# Altium PCB nora_chirp.PcbDoc
Units mil, origin at the board's own origin, x right, y up, seen from the top; angles counter-clockwise.
Board outline 2740 x 1400 mil, 2 copper layers (Top Layer, Bottom Layer), stack 64.8 mil thick; 71 components, 41 nets, 255 pads, 160 vias.
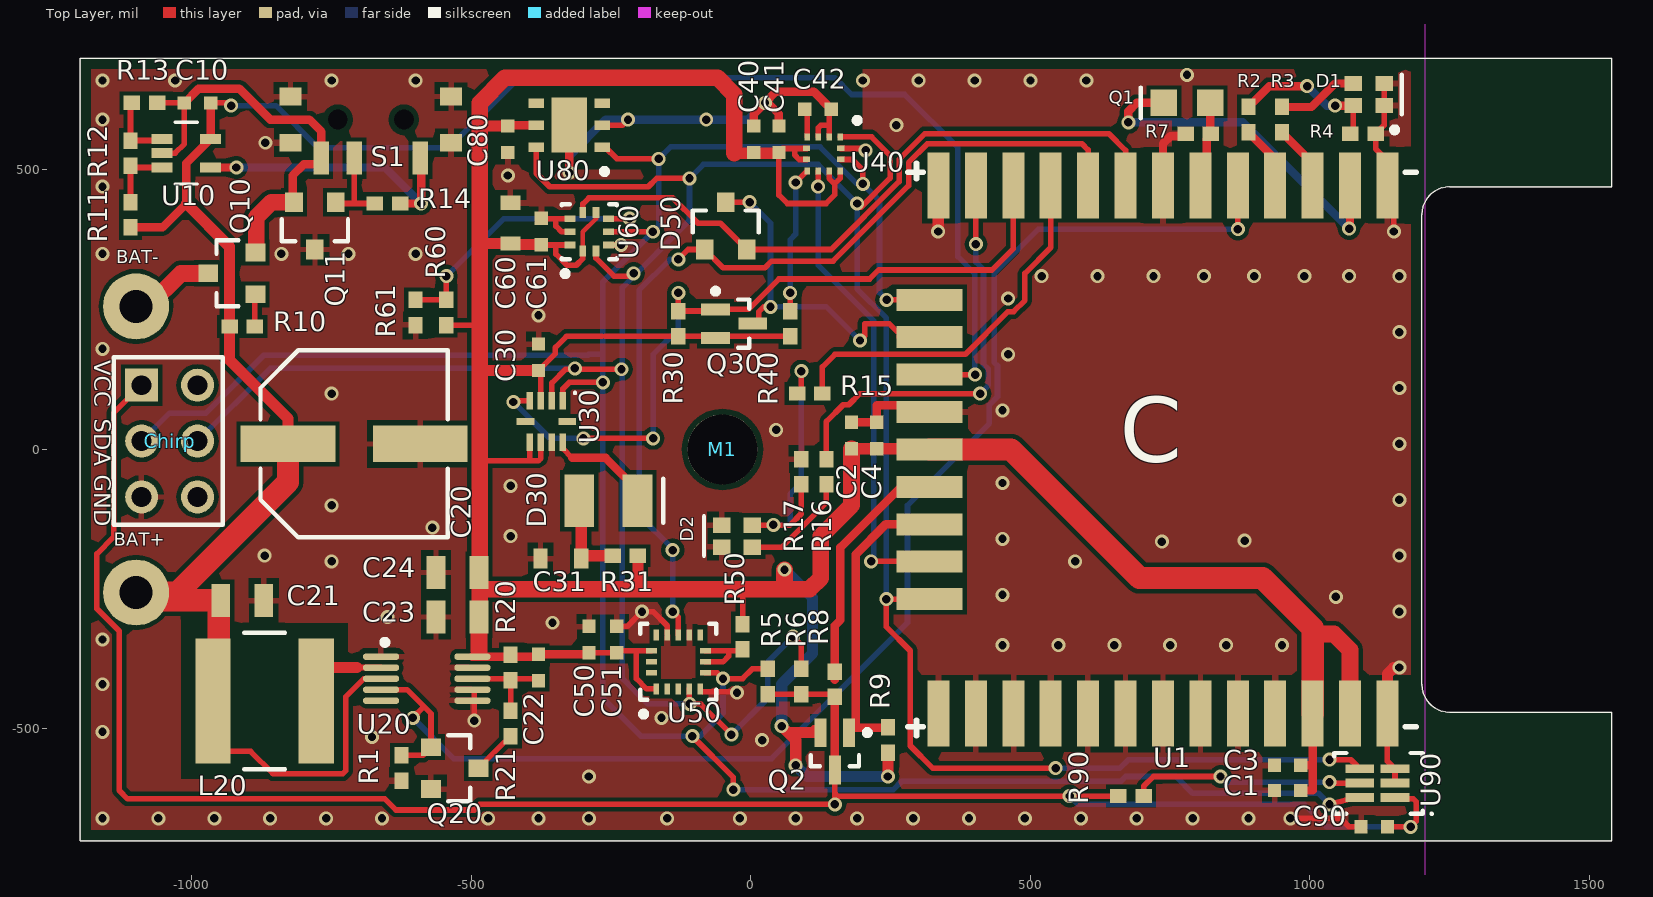
[diagram p0: Top Layer view]
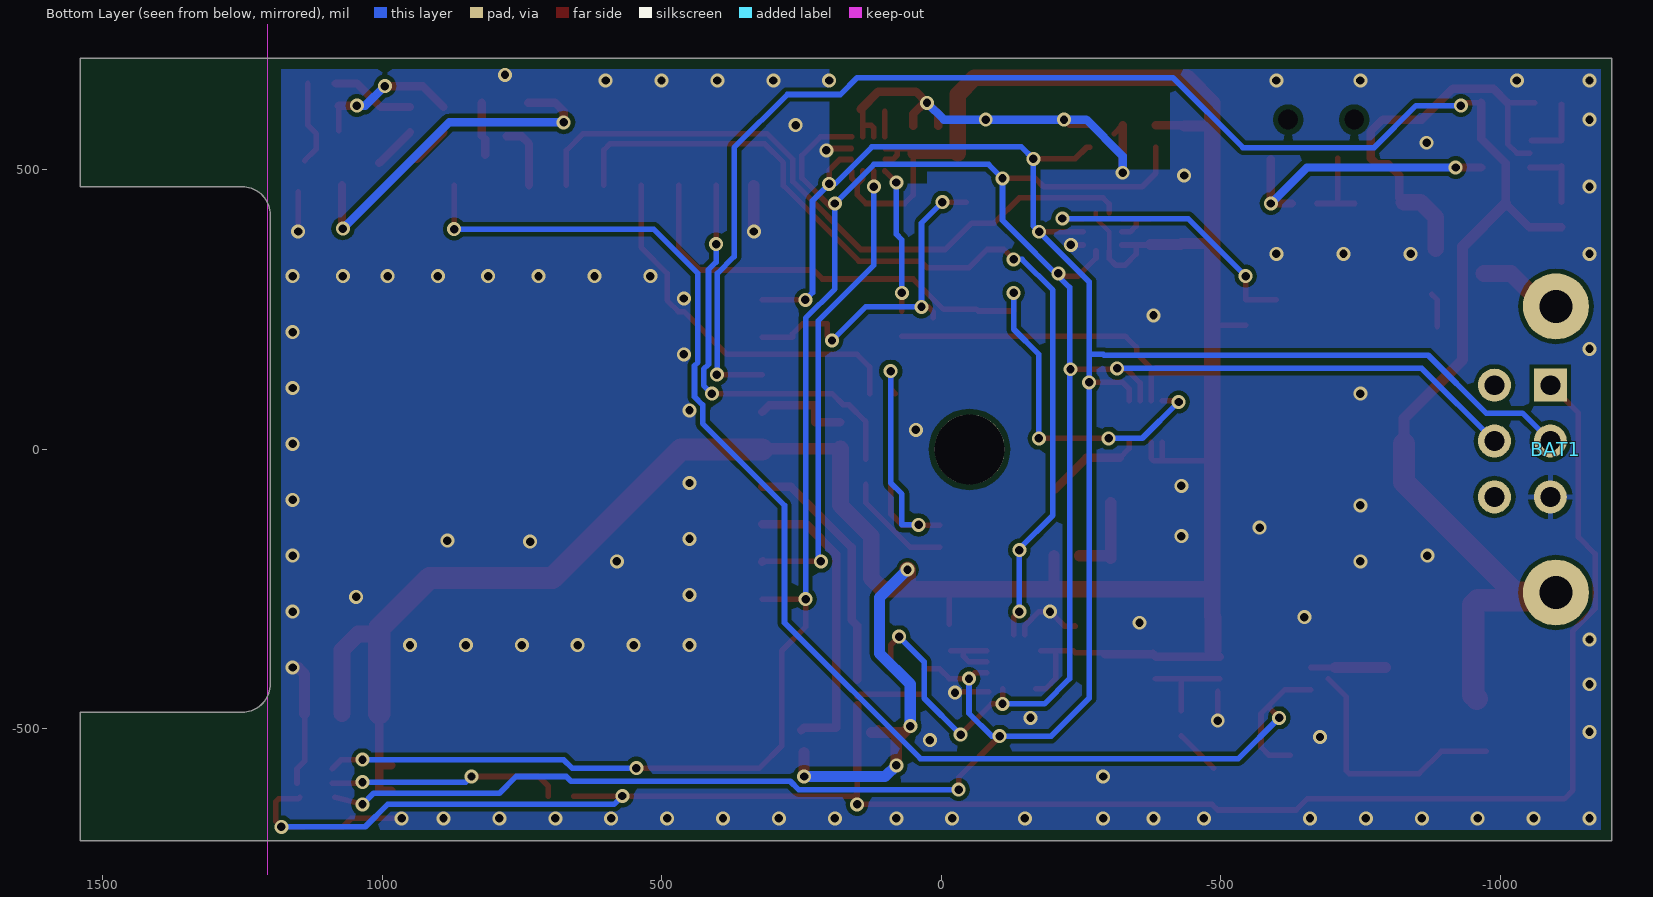
[diagram p1: Bottom Layer view, seen from below]

## Layer stack, top to bottom
Top Solder: solder mask 0.4, Solder Resist, Dk 3.5
Top Layer: signal copper 1.4
Dielectric1: core 62, FR-4, Dk 4.8
Bottom Layer: signal copper 1.4
Bottom Solder: solder mask 0.4, Solder Resist, Dk 3.5

## Board outline
-1200,-700 -1200,700 1540,700 1540,470 1250,470 ccw(c1250,420) 1200,420 1200,-420 ccw(c1250,-420) 1250,-470 1540,-470 1540,-700

## Design rules (kind name [scope] priority, off if disabled: settings)
Clearance "I2C clearance" [(InNet('SCL') AND IsTrack) vs (InNet('SDA') AND IsTrack)] p1: gap=8
Clearance "NPTH Clearance" [IsThruPin and (not PadIsPlated)] p2: gap=10
Clearance "Diff to Poly" [(InDifferentialPairClass('All Differential Pairs')) OR InNet('PinA') OR InNet('PinB') vs InPolygon] p3: gap=30
Clearance "50_OHM to Poly" [InNetClass('50_OHM') and (IsTrack or IsArc) vs InPolygon] p4: gap=30
Clearance "Polygon to All" [InPolygon] p5: gap=8
Clearance [All] p6: gap=6
Clearance "Pad Clearance" [IsPad vs IsPad] p7: gap=8
Clearance "XTAL Clearance" [(InNet('OSC32_IN') OR InNet('OSC32_OUT') OR InComponent('Y1')) vs InPolygon] p8: gap=30
HoleSize [All] p1: absolutevalues=TRUE maxlimit=125 minlimit=1 maxpercent=80.000 minpercent=20.000
HoleToHoleClearance [All] p1: gap=6 allowstackedmicrovias=TRUE
MinimumSolderMaskSliver [All] p1: minsoldermaskwidth=1
PolygonConnect "Direct GND" [InNet('GND') and IsVia] p1: connectstyle=Direct reliefconductorwidth=10 reliefentries=4 polygonreliefangle="90 Angle" airgapwidth=10
PolygonConnect [All] p2: connectstyle=Relief reliefconductorwidth=10 reliefentries=4 polygonreliefangle="90 Angle" airgapwidth=10
RoutingVias [All] p1: holewidth=15 width=25 viastyle="Through Hole" minholewidth=8 minwidth=18 maxholewidth=15 maxwidth=25
SilkToSilkClearance [All] p1: silktosilkclearance=3.94
SilkToSolderMaskClearance [IsPad vs Not HasFootprint('IMP_MODULE')] p1: minsilkscreentomaskgap=7.87 clearancetoexposedcopper=TRUE
SolderMaskExpansion [All] p1: expansion=4
UnpouredPolygon [All] p1: allowunpoured=FALSE
Width 50_OHM [InNetClass('50_OHM')] p1: maxlimit=8.96 minlimit=8.96 preferedwidth=8.96 impedancedriven=TRUE minimp=50.000000 maximp=50.000000 favimp=50.000000
Width [All] p2: maxlimit=100 minlimit=6 preferedwidth=10 minimp=50.000000 maximp=50.000000 favimp=50.000000 checkconnectedcopper=TRUE
24 further rules are at their usual default settings.

## Components (designator, comment, footprint, x,y, rotation, side; value= is the part's Value field where it differs from the comment)
BAT1 "BATTERY" 12BH321P-GR -80,0 r180 bottom locked
C1 "Ceramic Capacitor" CAPC1005X07N 960,-610 r0 top
C2 "Ceramic Capacitor" CAPC1005X07N 180,25 r270 top
C3 "Ceramic Capacitor" CAPC1005X07N 960,-565 r0 top
C4 "Ceramic Capacitor" CAPC1005X07N 225,25 r270 top
C10 "Ceramic Capacitor" CAPC1005X07N -990,620 r0 top
C20 "Polarized Capacitor" CAPAE8983X55N -710,10 r0 top
C21 "Ceramic Capacitor" CAPC2012X14N -910,-270 r180 top
C22 "Ceramic Capacitor" CAPC1005X07N -380,-390 r90 top
C23 "Ceramic Capacitor" CAPC2012X14N -525,-300 r0 top
C24 "Ceramic Capacitor" CAPC2012X14N -525,-220 r0 top
C30 "Ceramic Capacitor" CAPC1005X07N -380,165 r270 top
C31 "Ceramic Capacitor" CAPC1608X10N -340,-195 r0 top
C40 "Ceramic Capacitor" CAPC1005X07N 5,555 r270 top
C41 "Ceramic Capacitor" CAPC1005X07N 50,555 r270 top
C42 "Ceramic Capacitor" CAPC1005X07N 120,608.62 r180 top
C50 "Ceramic Capacitor" CAPC1005X07N -290,-340 r270 top
C51 "Ceramic Capacitor" CAPC1005X07N -240,-340 r270 top
C60 "Ceramic Capacitor" CAPC1608X10N -430,405 r270 top
C61 "Ceramic Capacitor" CAPC1005X07N -375,390 r270 top
C80 "Ceramic Capacitor" CAPC1005X07N -435,555 r90 top
C90 "Ceramic Capacitor" CAPC1005X07N 1115,-675 r0 top
Chirp "" "Chirp HDR3+1" -1090,115 r270 top
D1 "LED Red and Green" LED1616X07N-REDGREEN 1105,635 r180 top
D2 "LED Red and Green" LED1616X07N-REDGREEN -25,-155 r0 top
D30 "LED IR" LED3324X17N -255,-210 r180 top
D50 "Dual Schottky Diode" SOT95P300X130-3N -45,400 r90 top
L20 "Inductor" INDP6060X28N -870,-450 r0 top
M1 "Mounting Hole" 4-40-NP -51,0 r0 top
Q1 "PHOTOTRANSISTOR" PHOTOTRANS2012X13 780,620 r0 top
Q2 "PFET" SOT65P210X110-3N 150,-540 r270 top
Q10 "N-Channel MOSFET" SOT95P300X130-3N -928.61,315 r180 top
Q11 "N-Channel MOSFET" SOT95P300X130-3N -780,400 r270 top
Q20 "N-Channel MOSFET" SOT95P300X130-3N -530,-570 r0 top
Q30 "PFET" SOT65P210X110-3N -30,225 r0 top
R1 "Resistor" RESC1005X04N -625,-570 r90 top
R2 "Resistor" RESC1005X04N 890,590 r90 top
R3 "Resistor" RESC1005X04N 950,590 r90 top
R4 "Resistor" RESC1005X04N 1095,565 r180 top
R5 "Resistor" RESC1005X04N 30,-415 r90 top
R6 "Resistor" RESC1005X04N 90,-415 r90 top
R7 "Resistor" RESC1005X04N 800,565 r180 top
R8 "Resistor" RESC1005X04N 150,-420 r90 top
R9 "Resistor" RESC1005X04N 245,-520 r90 top
R10 "Resistor" RESC1005X04N -910,220 r180 top
R11 "Resistor" RESC1005X04N -1110,420 r90 top
R12 "Resistor" RESC1005X04N -1110,530 r90 top
R13 "Resistor" RESC1005X04N -1085,620 r0 top
R14 "Resistor" RESC1005X04N -650,440 r180 top
R15 "Resistor" RESC1005X04N 105,100 r180 top
R16 "Resistor" RESC1005X04N 135,-40 r270 top
R17 "Resistor" RESC1005X04N 90,-40 r270 top
R20 "Resistor" RESC1005X04N -430,-390 r270 top
R21 "Resistor" RESC1005X04N -430,-490 r90 top
R30 "Resistor" RESC1005X04N -130,225 r90 top
R31 "Resistor" RESC1005X04N -225,-190 r180 top
R40 "Resistor" RESC1005X04N 70,225 r90 top
R50 "Resistor" RESC1005X04N -15,-335 r90 top
R60 "Resistor" RESC1005X04N -545,245 r90 top
R61 "Resistor" RESC1005X04N -600,245 r270 top
R90 "Resistor" RESC1005X04N 680,-620 r0 top
S1 "Slide Switch" CUS-12TB -680,590 r180 top
U1 "imp module" IMP_MODULE 300,492.13 r270 top locked
U10 "MIC841" SOT65P200X125-5N -1010,530 r0 top
U20 "XC9128" MSOP50P490X116-10N -580,-410 r0 top
U30 "SI1145" QFN50P200X200X75-10N -366,50 r270 top
U40 "LIS3MDL" PQFN50P200X200X100-12N 130,528.62 r270 top
U50 "LIS3DHTR" LGA50P300X300X100-16N-ST -130,-380 r90 top
U60 "LPS25H" PQFN60P250X250X100-10N -289,389.45 r90 top
U80 "SI7021" QFN100P300X300X80_HS-7N -325,580 r180 top
U90 "TSL2561" TSL2561 1090,-575 r180 top

## Footprints (in the part's own frame and the unit in brackets; to place one, negate y for a bottom-side part, rotate by r counter-clockwise, add the part's x,y. Pads: shape width x height; smd on the part's side, far side on the other; paste and mask are expansions set on the pad)
4-40-NP [mil] "4-40 Mounting Hole Non Plated"
  round 125 hole 125 unplated mask+5: 0(0,0)
12BH321P-GR [mm] "2xAA Series Battery Clip with Through-Hole PCB Mount"
  round 3 hole 1.5: +(25.908,-6.5) -(25.908,6.5)
  body extent -28.45,-16.51 28.45,16.51, height 16.11
CAPAE8983X55N [mm] "Aluminum Electrolytic Capacitor, Body 8.30x8.30x5.50mm, IPC Medium Density"
  rect 4.3x1.65 smd: 1(-3,0) 2(3,0)
  silkscreen extent -4.25,-4.25 4.25,4.25, body extent -4.45,-4.15 4.45,4.15, height 6.2
CAPC1005X07N [mm] "Chip Capacitor, 2-Leads, Body 1.0x0.5mm, IPC Medium Density"
  rect 0.6x0.6 smd: 1(-0.6,0) 2(0.6,0)
  body extent -0.5,-0.25 0.5,0.25, height 0.6
CAPC1608X10N [mm] "Chip Capacitor, 2-Leads, Body 1.6x0.8mm, IPC Medium Density"
  rect 0.65x0.9 smd: 1(-0.925,0) 2(0.925,0)
  body extent -0.8,-0.4 0.8,0.4, height 0.95
CAPC2012X14N [mm] "Chip Capacitor, 2-Leads, Body 2.0x1.3mm, IPC Medium Density"
  rect 0.85x1.5 smd: 1(-0.975,0) 2(0.975,0)
  body extent -1,-0.6 1,0.6, height 1.4
"Chirp HDR3+1" [mm] "Connector; Header; 3+1 for Chirp"
  rect 1.5x1.5 hole 0.9: 1(0,0)
  round 1.5 hole 0.9: 2(2.54,0) 3(5.08,0) 4(5.08,2.54) 5(2.54,2.54) 6(0,2.54)
  silkscreen extent -1.27,-1.27 6.35,3.68
CUS-12TB [mm] "SPDT Slide Switch, R/A, SMD"
  round 0 hole 0.9 unplated: 0(-1.5,0) 0(1.5,0)
  rect 0.7x1.5 smd: 1(-2.25,1.75) 2(0.75,1.75) 3(2.25,1.75)
  rect 1x0.8 smd: 4(-3.65,-1.05) 4(-3.65,1.05) 4(3.65,-1.05) 4(3.65,1.05)
  body extent -3.4,-2.8 3.4,1.3, height 1.4
IMP_MODULE [mm] "Imp Module, Shadow and Chase"
  rect 3x1 smd: 1(0.5,21.3) 2(0.5,19.6) 3(0.5,17.9) 4(0.5,16.2) 5(0.5,14.5) 6(0.5,12.8) 7(0.5,11.1) 8(0.5,9.4) 9(0.5,7.7) 10(0.5,6) 11(0.5,4.3) 12(0.5,2.6) 13(0.5,0.9) 23(24.5,0.9) 24(24.5,2.6) 25(24.5,4.3) 26(24.5,6) 27(24.5,7.7) 28(24.5,9.4) 29(24.5,11.1) 30(24.5,12.8) 31(24.5,14.5) 32(24.5,16.2) 33(24.5,17.9) 34(24.5,19.6) 35(24.5,21.3)
  rect 1x3 smd: 14(5.7,0.5) 15(7.4,0.5) 16(9.1,0.5) 17(10.8,0.5) 18(12.5,0.5) 19(14.2,0.5) 20(15.9,0.5) 21(17.6,0.5) 22(19.3,0.5)
  Keep-Out Layer region: -10.001,23 34.999,23 34.999,41 -10.001,41
  silkscreen extent -2.15,-0.5 25.5,22.6, body extent 0,0 25,31, height 1.8
INDP6060X28N [mm] "Precision Wire Wound Inductor, 2-Leads, Body 6.0x6.0mm, IPC Medium Density"
  rect 1.6x5.7 smd: 1(-2.35,0) 2(2.35,0)
  silkscreen extent -0.92,-3.1 0.92,3.1, body extent -3.1,-3.1 3.1,3.1, height 2.8
LED1616X07N-REDGREEN [mm] "Bi-Color LED, 0606 (1616 metric), Red, Green"
  rect 0.8x0.7 smd: AG(0.7,-0.5) AR(0.7,0.5) KG(-0.7,-0.5) KR(-0.7,0.5)
  silkscreen extent -1.5,-0.9 -1.5,0.9, body extent -0.8,-0.8 0.8,0.8, height 0.7
LED3324X17N [mm] "Osram SFH 4651-Z"
  rect 1.35x2.4 smd: A(1.325,-3) K(-1.325,-3)
  silkscreen extent -2.5,-4 -2.5,-2, body extent -1.65,-4.17 1.65,-1.82, height 1.7
LGA50P300X300X100-16N-ST [mm] "PQFN, 16-Leads, Body 3x3mm, Pitch 0.5mm, IPC Medium Density, For ST Mems Devices"
  rect 0.5x0.25 smd paste+0 mask+0.025: 1(-1.225,1)
  rect 0.5x0.25 smd mask+0.025: 2(-1.225,0.5) 3(-1.225,0) 4(-1.225,-0.5) 5(-1.225,-1) 9(1.225,-1) 10(1.225,-0.5) 11(1.225,0) 12(1.225,0.5) 13(1.225,1)
  rect 0.25x0.5 smd mask+0.025: 6(-0.5,-1.225) 7(0,-1.225) 8(0.5,-1.225) 14(0.5,1.225) 15(0,1.225) 16(-0.5,1.225)
  silkscreen extent -2.5,-1.73 1.73,1.73, body extent -1.58,-1.58 1.58,1.58, height 1
MSOP50P490X116-10N [mm] "MSOP, 10-Leads, Body 3.1x3.1mm (max), Pitch 0.50mm, IPC Medium Density"
  oval 1.65x0.3 smd: 1(-2.075,1) 2(-2.075,0.5) 3(-2.075,0) 4(-2.075,-0.5) 5(-2.075,-1) 6(2.075,-1) 7(2.075,-0.5) 8(2.075,0) 9(2.075,0.5) 10(2.075,1)
  silkscreen extent -2.03,1.53 -1.78,1.78, body extent -1.55,-1.55 1.55,1.55, height 1.16
PHOTOTRANS2012X13 [mm] "Phototransistor, Top View, 0805 (2012 Metric)"
  rect 1.2x1.2 smd: C(-1.05,0) E(1.05,0)
  silkscreen extent -2.1,-0.7 -2.1,0.7, body extent -1,-0.63 1,0.63, height 1.3
PQFN50P200X200X100-12N [mm] "PQFN, 12-Leads, Body 2.00x2.00mm, Pitch 0.50mm, IPC Medium Density"
  rect 0.325x0.25 smd mask+0.075: 1(-0.775,0.75) 2(-0.775,0.25) 3(-0.775,-0.25) 4(-0.775,-0.75) 7(0.775,-0.75) 8(0.775,-0.25) 9(0.775,0.25) 10(0.775,0.75)
  rect 0.25x0.325 smd mask+0.075: 5(-0.25,-0.775) 6(0.25,-0.775) 11(0.25,0.775) 12(-0.25,0.775)
  silkscreen extent -1.65,1.4 -1.4,1.65, body extent -1.08,-1.07 1.07,1.08, height 1
PQFN60P250X250X100-10N [mm] "PQFN, 10-Leads, Body 2.50x2.50mm, Pitch 0.60mm, IPC Medium Density"
  rect 0.5x0.3 smd mask+0.02: 1(-0.875,0.3) 2(-0.875,-0.3) 6(0.875,-0.3) 7(0.875,0.3)
  rect 0.3x0.5 smd mask+0.02: 3(-0.6,-0.875) 4(0,-0.875) 5(0.6,-0.875) 8(0.6,0.875) 9(0,0.875) 10(-0.6,0.875)
  silkscreen extent -2.02,-1.25 1.25,1.25, body extent -1.25,-1.25 1.25,1.25, height 1
QFN50P200X200X75-10N [mm] "QFN, 10-Leads, Body 2.00x2.00mm, Pitch 0.50mm, IPC Medium Density"
  rect 0.8x0.3 smd mask+0.075: 1(-0.95,0.75) 2(-0.95,0.25) 3(-0.95,-0.25) 4(-0.95,-0.75) 6(0.95,-0.75) 7(0.95,-0.25) 8(0.95,0.25) 9(0.95,0.75)
  rect 0.3x0.8 smd mask+0.075: 5(0,-0.95) 10(0,0.95)
  silkscreen extent -1.35,1.25 -1.25,1.35, body extent -1,-1 1,1, height 0.75
QFN100P300X300X80_HS-7N [mm] "QFN, 6-Leads, Body 3.00x3.00mm, Pitch 1.00mm, Thermal Pad 2.35x1.50mm, IPC Medium Density"
  rect 0.7x0.45 smd mask+0.05: 1(-1.5,1) 2(-1.5,0) 3(-1.5,-1) 4(1.5,-1) 5(1.5,0) 6(1.5,1)
  rect 1.6x2.5 smd mask+0.05: 7(0,0)
  silkscreen extent -1.73,1.98 -1.48,2.22, body extent -1.5,-1.5 1.5,1.5, height 0.8
RESC1005X04N [mm] "Chip Resistor, 2-Leads, Body 1.0x0.5mm, IPC Medium Density"
  rect 0.75x0.65 smd: 1(-0.575,0) 2(0.575,0)
  body extent -0.5,-0.25 0.5,0.25, height 0.35
SOT65P200X125-5N [mm] "SOT-323-5, SC70-5"
  rect 0.95x0.45 smd paste+0 mask+0.05: 1(-1.1,0.65) 2(-1.1,0) 3(-1.1,-0.65) 4(1.1,-0.65) 5(1.1,0.65)
  silkscreen extent -0.5,-1.4 0.5,1.4, body extent -1.15,-1.05 1.15,1.05, height 1
SOT65P210X110-3N [mm] "SOT23, 3-Leads, Body 2.00x2.10mm, Pitch 0.65mm, IPC Medium Density"
  rect 1.3x0.55 smd: 1(-0.85,0.65) 2(-0.85,-0.65) 3(0.85,0)
  silkscreen extent -0.97,-1.1 0.67,1.6, body extent -0.67,-1.1 0.67,1.1, height 1.1
SOT95P300X130-3N [mm] "SOT-23"
  rect 0.9x0.8 smd: 1(-1.075,0.95) 2(-1.075,-0.95) 3(1.075,0)
  silkscreen extent -0.3,-1.5 0.7,1.5, body extent -1.17,-1.45 1.17,1.47, height 1
TSL2561 [mm]
  rect 1.3x0.4 smd: 1(-1.577,1.204) 2(-1.577,0.554) 3(-1.577,-0.096) 4(0.023,-0.096) 5(0.023,0.554) 6(0.023,1.204)
  silkscreen extent -3.29,-0.81 1.19,2, body extent -2.16,-0.38 0.64,1.55, height 1

## Part data
BAT1: library part BAT00006, "2xAA Series Battery Clip with Through-Hole PCB Mount"
C1 C2 C40 C50: library part CAPC00005, "CAP,X5R,1.0uF,10%,6.3V, 0402,#"
C3 C4: library part CAPC00043, "CAP,C0G,100pF,5%,50V,0402"
C10 C30 C41 C42 C51 C61 C80: library part CAPC00103, "CAP,X5R,0.1uF,10%,6.3V, 0402,#"
C20: library part CAPC00106, "CAP,Alum,330uF,20%,6.3V,SMD"
C21 C24: library part CAPC00039, "CAP,X5R,22uF,10%,6.3V,0805,#"
C22: library part CAPC00105, "CAP,C0G,15pF,5%,50V,0402"
C23: library part CAPC00036, "CAP,X5R,10uF,10%,6.3V,0805,#"
C31 C60: library part CAPC00033, "CAP,X5R,4.7uF,10%,6.3V,0603,#"
C90: library part CAPC00002, "CAP,X5R,0.1uF,10%,6.3V, 0402,#"
Chirp: library part "Chirp HDR3+1", "header for chirp"
D1 D2: library part LED00012, "LED, Red and Green, 2/2V, 631/571nm, 25/35mcd, SMT"
D30: library part LED00053, "LED, IR, 1.6V@70mA, 850nm, SMT"
D50: library part SCHOTTKY00009, "DIODE, Schottky, 200mA, 30V, Dual, Common Cathode, SOT23"
L20: library part IND00007, "IND, 4.7uH, 20%, 2.7A Isat, 403 mOhm, 6028"
M1: library part MNT00004, "#4-40 Mounting Hole Non Plated"
Q1: library part PHOTO00002, "Phototrans, Clear, Top View, 940nm, 0.4V, 1mA, 0805"
Q2 Q30: library part PFET00009, "PFET, 20V, 820mA, 1V, SOT323"
Q10 Q11: library part NFET00004, "NFET, 20V, 4.2A, SOT23"
Q20: library part NFET00003, "NFET, 25V, 220mA, SOT23"
R1 R10 R50: library part RES00001, "RES,100k,5%,0.063W,0402,#"
R2 R3 R15 R16: library part RES00024, "RES,100,1%,0.063W,0402,#"
R4 R17: library part RES00006, "RES,10k,5%,0.063W,0402,#"
R5 R6: library part RES00005, "RES,4.7K,5%,0.063W,0402,#"
R7: library part RES00007, "RES,22K,5%,0.063W,0402"
R8 R9 R30 R40 R60 R61 R90: library part RES00001, "RES,100K,5%,0.063W,0402,#"
R11: library part RES00095, "RES,619K Ohm,1%,0.063W,0402"
R12: library part RES00096, "RES,158K Ohm,1%,0.063W,0402"
R13: library part RES00039, "RES,1M,1%,0.1W,0402,#"
R14: library part RES00010, "RES,1M,5%,0.063W,0402,#"
R20: library part RES00002, "RES,220K,5%,0.063W,0402"
R21: library part RES00041, "RES,43K,1%,0.063W,0402"
R31: library part RES00045, "RES,470 Ohm,5%,0.063W,0402"
S1: library part SWITCH00002, "SPDT Slide Switch, R/A, SMD"
U1: library part MOD00002, "Module, Electric Imp Solder Down with Antenna"
U10: library part IC00032, "IC, Comparator with Reference and Programmable Hysteresis, SOT-353"
U20: library part IC00026, "IC, DC/DC boost,Adjustable, 6 VIN, 500mA, MSOP10"
U30: library part IC00167, "IC, Sensor, ALS, I2C, QFN10"
U40: library part IC00168, "IC, Sensor, Magnetometer, I2C, LGA12"
U50: library part IC00038, "IC, Accelerometer, 3-Axis, Low Power, 16-bit, LGA16"
U60: library part IC00166, "IC, Sensor, Barometer, I2C, +/-1millibar, 10-TFLGA"
U80: library part IC00157, "IC, Sensor, Temp+Humidity, SI7021, +/-2% RH, DFN6"
U90: library part IC00029, "IC, Sensor,ALS,I2C,640nm/940nm,SMT"

## Via types
v1: diameter 25, hole 15, Top Layer to Bottom Layer, tented both sides, 134 vias
v2: diameter 25, hole 15, Top Layer to Bottom Layer, 26 vias

## Nets (pads, with @x,y where several pads share a name; then routed paths per layer and width w, separated by ;. In a path a pad name is that pad's centre, name@x,y a point inside that pad or via, vN(x,y) a via of type N, cw(c..) or ccw(c..) an arc to the next point about the centre after c; other vN are vias at no path point)
3V0_SENS: C90.2 Chirp.1 Q2.3 R5.1 R6.1 R8.1 R90.1 U90.1 | length 3651.6
  Top Layer w10: Chirp.1 -1140,65 -1140,-156.78 -1170.06,-186.83 -1170.06,-284.92 -1130,-324.98 -1130,-610 -1115,-625 -655,-625 -635,-645 -495,-645 -485,-635 v2(150,-635) 150,-615 ; R5.1 R6.1 145,-437.64 R8.1 ; Q2.3 150,-615 ; R90.1 v2(570,-620) 155,-620 150,-615 ; C90.2 v2(1180,-675) 1190,-665 1190,-630 1185,-625 1149.68,-625 U90.1@1147.09,-622.4
  Top Layer w15: Q2.3 150,-457.64
  Bottom Layer w10: v2(570,-620) 585,-635 990,-635 1030,-675 v2(1180,-675)
ACCEL_INT: D50.1 U1.9 U50.11 | length 1675.9
  Top Layer w10: v1(-140,-290) -130,-300 U50.11 ; v1(-130,340) -112.32,357.68 D50.1 -49.72,325 24.75,325 36.75,337 147,337 282,472 282,513.31 315.54,546.85 592.15,546.85 603.15,535.85 U1.9
  Bottom Layer w10: v1(-140,-290) v1(-140,-180) ; v1@-138.86,-178.86 -200,-117.72 -200,285 -145,340 v1(-130,340)
ALS_INT_L: Q30.1 R30.2 U1.11 U30.4 | length 1372.9
  Top Layer w10: v1(-425,85) -422.6,87.4 U30.4 ; v1(-300,20) v1(-175,20) ; v1(-130,280) R30.2 Q30.1@-66.42,247.64 ; Q30.1 -4.41,250.59 50,305 212.37,305 228.37,321 431,321 469.29,359.29 U1.11
  Bottom Layer w10: v1(-425,85) -360,20 v1(-300,20) ; v1(-175,20) -175,170 -130,215 v1(-130,280)
BARO_INT: D50.2 U1.8 U60.7 | length 1213.1
  Top Layer w10: U60.7 -300.81,439.19 -290,450 -140,450 -95,405 -54.92,405 D50.2 143.68,357.68 265,479 265,519 311,565 640,565 670.08,534.92 U1.8
BAT+: BAT1.+ C10.2 C20.1 C21.2 L20.1 R10.2 R11.1 U1.16 U10.5 U20.3 | length 3950.2
  Top Layer w10: L20.1@-975,-540 -895,-540 -855,-580 -730,-580 -725,-575 -725,-442.51 U20.3@-692.49,-410 ; U10.5 U10.5@-966.38,555.91 ; C10.2 v1@-935,620 ; U1.16 v1(401.13,133.87)
  Top Layer w15: R11.1 -1052.64,397.36 -1010,440 -1010,512.28 U10.5 ; U10.5@-966.38,555.91 C10.2
  Top Layer w20: -1010,440 -932.64,362.64 R10.2 -932.64,160 -828.11,55.47 C20.1
  Top Layer w40: BAT1.+ -1025.91,-255.91 -828.11,-58.11 C20.1 ; BAT1.+@-1071.81,-270 -960,-270 -952,-278 -952,-439.48 L20.1@-958.39,-445.87
  Bottom Layer w10: v1(-930,615) -850,615 -775,540 -540,540 -415,665 150,665 180,635 275,635 370,540 370,345 400,315 400,135 v1(401.13,133.87)
FB: C22.1 R20.2 R21.2 U20.8 | length 169.4
  Top Layer w10: U20.8 C22.1@-383.62,-410 ; R21.2 R20.2
GND: C1.1 C2.1 C3.1 C4.1 C20.2 C21.1 C23.1 C24.1 C30.1 C31.1 C40.1 C41.1 C42.1 C50.1 C51.1 C60.1 C61.1 C80.1 C90.1 Chirp.3 D1.KG D1.KR D2.KG D2.KR Q11.3 Q20.2 R1.1 R4.1 R7.2 R17.1 R61.2 S1.4 U1.1 U1.7 U1.13 U1.17 U1.23 U1.24 U1.25 U1.26 U1.27 U1.28 U1.29 U1.30 U1.31 U1.32 U1.35 U20.1 U20.6 U20.7 U20.9 U30.8 U40.2 U40.3 U40.12 U50.5 U50.10 U50.12 U60.3 U60.8 U60.9 U80.2 U80.7 U90.2 U90.3 | length 2255.6
  Top Layer w10: v1(-495,-485) U20.7@-495,-432.99 ; C61.1@-374.45,413.07 -349,413.07 ; U80.7 U80.7@-310,565 ; U60.9 -339,389.45 -349,399.45 -349,413.07 ; U60.8 -349,413.07 ; U80.2 -230,580 v2(-220,590) ; U60.3 -232.41,365.83 v1(-232.28,365.95) ; C51.1@-238.94,-315.32 C51.1 -221.38,-316.38 v1(-195,-290) -175,-290 -149.68,-315.32 U50.12 ; -85.36,-433.5 -26.5,-433.5 v1(-25,-435) ; U40.3 120.16,575.16 125,580 139.84,580 ; U40.2 139.84,580 ; C42.1@139.84,604.84 139.84,580 ; U40.12 201.54,538.46 v1(205,535) ; v1(965,-660) 1055,-660 1070,-675 C90.1 ; D1.KG D1.KR 1132.56,579.92 R4.1 1117.64,537.64 U1.1@1138.58,516.69 ; U1.35 1138.58,-557.72 U90.3 U90.2 ; v1(1150,390) U1.1@1150,461.03
  Top Layer w15: v1(-325,495) U80.7 ; C40.1 5,600 v1(25,620) 45,640 112.24,640 C42.1 ; v1@30,620 50,600 C41.1 ; C2.1 C4.1 225,78.85 307.77,78.85 U1.17 ; U1.7 737.01,547.01 750,560 R7.2@777.36,560
  Top Layer w20: v1(335,390) U1.13@335,472.02 ; U1.35 1138.58,-401.42 v1@1150,-390
  Bottom Layer w10: v1(-232.28,365.95) v1@-230.95,365.95
  Bottom Layer w15: v1(-325,495) -325,525 -260,590 v2(-220,590) v1(-80,590) -5,590 v1(25,620)
  other v1: -1160,-660 -1060,-660 -960,-660 -860,-660 -760,-660 -660,-660 -470,-660 -380,-660 -290,-660 -150,-660 -20,-660 80,-660 190,-660 290,-660 390,-660 490,-660 590,-660 690,-660 790,-660 890,-660 -290,-585 20,-520 -678,-514.31 -160,-480 1160,-390 450,-350 550,-350 650,-350 750,-350 850,-350 950,-350 -1160,-340 -355,-310 -650,-300 1160,-290 1046.22,-263.78 450,-260 -750,-200 580,-200 -870,-190 1160,-190 735,-165 883.05,-163.05 450,-160 -430,-155 -570,-140 -750,-100 1160,-90 -430,-65 450,-60 1160,10 450,70 -750,100 1160,110 460,170 1160,210 -380,240 460,270 520,310 620,310 720,310 810,310 900,310 990,310 1070,310 1160,310 -1160,350 -840,350 -720,350 -600,350 -1160,470 -435,490 -868.66,548.66 260,580 -1160,590 -1160,660 -1030,660 -750,660 -600,660 200,660 300,660 400,660 500,660 600,660 780,670
  other v2: -1160,-505 -1160,-420 45,35 -1160,180
IMP_WAKEUP: D50.3 Q30.3 U1.15 | length 629.2
  Top Layer w10: D50.3 v1(-2.32,442.32) ; Q30.3@13.81,235.35 13.81,246.19 22.63,255 v1(35,255) ; v1(195,195) 203.46,203.46 203.46,225 247.26,225 265.63,206.63 265.63,200.79 U1.15
  Bottom Layer w10: v1(-2.32,442.32) 35,405 v1(35,255) 135,255 v1(195,195)
INDICATOR_GREEN: R16.1 U1.12 | length 750.8
  Top Layer w10: R16.1 135,50 165,80 175,80 195,100 v2(410,100) ; v2(402.36,367.36) U1.12
  Bottom Layer w10: v2(402.36,367.36) 402.36,335.26 416,321.63 416,152.23 424.63,143.6 424.63,114.63 v2(410,100)
INDICATOR_RED: R15.1 U1.10 | length 684.2
  Top Layer w10: R15.1 127.64,147.64 150.11,170.11 383.3,170.11 459.69,246.5 469.73,246.5 490,266.77 490,315 536.22,361.22 U1.10
LED_GREEN: R3.1 U1.3 | length 77.4
  Top Layer w15: R3.1 U1.3@1004.72,512.64
LED_RED: R2.1 U1.4 | length 67.6
  Top Layer w15: R2.1 U1.4@937.8,519.57
LX: L20.2 U20.2 | length 133.6
  Top Layer w11: -705.31,-390.31 U20.2
  Top Layer w20: L20.2@-795.31,-390.31 -705.31,-390.31
MAG_DRDY: U1.21 U40.8 | length 846.5
  Top Layer w10: v1(120.16,470.16) U40.8 ; v1(215,-200) U1.21@318.91,-200
  Top Layer w15: U1.21@318.91,-200 U1.21
  Bottom Layer w10: v1(120.16,470.16) 120.16,329.84 220,230 220,-195 v1(215,-200)
MAG_INT_L: R40.2 U40.7 | length 263.1
  Top Layer w10: R40.2 v1(70,280) ; v1(80,477.64) U40.7
  Bottom Layer w10: v1(70,280) 70,375 80,385 v1(80,477.64)
NetBAT1_-: BAT1.- Q10.3 | length 132.6
  Top Layer w30: BAT1.-@-1079.09,255.91 -1020,315 Q10.3
NetC10_1: C10.1 Q10.2 Q11.2 R13.2 S1.3 U10.2 | length 731.8
  Top Layer w10: R13.2 C10.1 -1013.62,546.38 -1030,530 U10.2
  Top Layer w15: C10.1 -988.31,645.31 -915.31,645.31 -860,590 -790,590 -768.58,568.58 S1.3 -779.69,510 -800,510 -820,490 Q11.2@-820,450
  Top Layer w30: Q10.2@-885,359.72 -885,415 -857.68,442.32 Q11.2@-827.68,442.32
NetC31_2: C31.2 D30.A R31.2 | length 150.5
  Top Layer w20: C31.2 D30.A@-303.58,-95.47 ; C31.2@-298.58,-190 R31.2
NetC42_2: C42.2 U40.4 | length 45.4
  Top Layer w10: U40.4 C42.2@100.47,604.53
NetD1_AG: D1.AG R3.2 | length 149.9
  Top Layer w15: R3.2 1002.64,612.64 1044.68,654.68 D1.AG@1082.44,654.68
NetD1_AR: D1.AR R2.2 R4.2 | length 262.7
  Top Layer w10: R4.2@1077.44,570.08 1077.44,615 D1.AR
  Top Layer w15: R2.2 927.36,650 v1(995,650) ; v1(1045,615) D1.AR@1077.44,615
  Bottom Layer w15: v1(995,650) 1030,615 v1(1045,615)
NetD2_AG: D2.AG R16.2 | length 197.8
  Top Layer w10: D2.AG 55.32,-174.68 135,-95 R16.2
NetD2_AR: D2.AR R15.2 R17.2 | length 504.7
  Top Layer w10: D2.AR 69.68,-135.32 90,-115 R17.2 ; R15.2 90,107.64 v2(90,140)
  Bottom Layer w10: v2(40,-135) 70,-135 70,-80 90,-60 v2(90,140)
NetD30_K: D30.K U30.9 | length 175.3
  Top Layer w10: U30.9 -336.47,1.47 -320,-15
  Top Layer w15: -320,-15 -260,-15 D30.K@-202.83,-72.17
NetQ10_1: Q10.1 R10.1 | length 61.6
  Top Layer w10: R10.1 -887.36,267.91 Q10.1@-877.68,277.6
NetQ11_1: Q11.1 R14.2 S1.2 | length 145.7
  Top Layer w10: Q11.1@-740.28,440 R14.2 ; -709.53,443.07 S1.2
NetQ20_3: Q20.3 R21.1 | length 81.4
  Top Layer w10: Q20.3 -487.36,-570 R21.1
NetR11_2: R11.2 R12.1 U10.3 | length 118.5
  Top Layer w10: R11.2 R12.1 ; R12.1@-1107.05,504.41 U10.3
NetR12_2: R12.2 R13.1 U10.1 | length 118.7
  Top Layer w10: R13.1@-1110,617.64 R12.2 U10.1@-1056.26,552.64
NetR50_1: R50.1 U50.7 U50.8 | length 119.7
  Top Layer w10: U50.7 -50,-380 -40,-370 -40,-360.31 ; U50.8 -40,-360.31 ; R50.1@-17.68,-360.31 -40,-360.31
NetR60_2: R60.2 R61.1 U60.5 | length 505.7
  Top Layer w10: R61.1 R60.2 v1(-545,310) ; U60.5 v1(-216.93,413.07)
  Bottom Layer w10: v1(-545,310) -441.93,413.07 v1(-216.93,413.07)
NetR90_2: R90.2 U90.5 | length 408.6
  Top Layer w10: R90.2 702.64,-602.36 720,-585 v2(840,-585) ; v2@1041.81,-596.81 U90.5
  Bottom Layer w10: v2(840,-585) 850,-595 v2(1035,-595)
OPTO_BIAS: Q1.C U1.2 | length 639.4
  Top Layer w15: v1(675,585) 675,605 690,620 Q1.C ; v1@1071.65,396.65 U1.2
  Bottom Layer w15: v1(675,585) 880,585 v1(1070,395)
OPTO_IN: Q1.E R7.1 U1.6 | length 86.1
  Top Layer w15: U1.6@815.3,527.34 R7.1@815.3,554.7 ; R7.1@821.34,561.3 Q1.E
POWER_EN: Q20.1 R1.2 U1.5 U20.4 | length 2514.9
  Top Layer w10: U20.4 -615.32,-429.68 -585,-460 ; R1.2 -587.09,-547.36 Q20.1 -572.32,-472.68 -585,-460 ; v1(-605,-480) -585,-460 ; v1(870.87,394.13) U1.5
  Bottom Layer w10: v1(-605,-480) -532,-553 37,-553 280,-310 280,-100 426.5,46.5 426.5,79.73 441,94.23 441,149.86 435,155.86 435,315 514.13,394.13 v1(870.87,394.13) v1@873.5,391.5
SCL: Chirp.5 R6.2 U1.22 U30.2 U40.1 U50.4 U60.2 U80.6 U90.4 | length 5303.4
  Top Layer w10: U80.6 -384.06,494.06 -360,470 -183.75,470 -168.75,485 v1(-110,485) v1@-108.43,485 ; U30.2 -356.16,118.84 -331.5,143.5 v1(-231.5,143.5) ; U60.2 -277.19,342.19 -245,310 -205,310 v1(-210,315) ; U50.4 -110.31,-454.69 v1(-110,-455) -90,-455 v2(-35,-510) ; v2(75,-335) 90,-350 R6.2 ; U40.1 215.87,559.13 249,526 249,485.63 v1@196.69,433.31 ; U1.22 v1(242.29,-267.71) 242.29,-317.29 285,-360 285,-530 325,-570 v2@540,-570 ; v2(1035,-555) 1072.87,-555 U90.4
  Bottom Layer w10: Chirp.5 -860,145 v2(-315,145) ; v1(-110,-455) -185,-455 -230,-410 -230,290 -110,410 v1(-110,485) -85,510 120,510 v1(190,440) 190,287.21 242.29,234.92 v1(242.29,-267.71) ; v2(-35,-510) 30,-445 30,-380 v2(75,-335) ; v2(545,-570) 660,-570 675,-555 v2(1035,-555)
SDA: Chirp.2 R5.2 U1.14 U30.1 U40.11 U50.6 U60.4 U80.1 U90.6 | length 4676
  Top Layer w10: U30.1 -336.47,108.53 -325,120 v1(-265,120) ; U80.1 -260.63,540.63 -240,520 v1(-165,520) ; U60.4 v1(-175.55,389.45) ; v2(-105,-513) -31.5,-586.5 v2(-31.5,-608.5) ; U50.6 -60.32,-399.68 v1(-50,-410) -15,-410 2.64,-392.36 R5.2 ; U40.11 181.22,518.78 200,500 v1(200,475) ; v1(242.72,267.72) U1.14 ; v2(1035,-635) U90.6@1084.09,-622.4
  Bottom Layer w10: Chirp.2 -1040,65 -975,65 -871.5,168.5 -291.5,168.5 -290,170 -265,170 ; v1(-50,-410) -50,-472 -91,-513 v2(-105,-513) -197,-513 -265,-445 v1(-265,120) -265,170 ; v2(-31.5,-608.5) 254.73,-608.5 269.73,-593.5 661.96,-593.5 670.46,-585 760,-585 790,-615 1015,-615 v2(1035,-635) ; v1(242.72,267.72) 230,280.45 230,445 v1(200,475) 190,475 123.72,541.28 -143.72,541.28 v1(-165,520) -165,400 v1(-175.55,389.45) -265,300 -265,170
SENS_DRAIN: R8.2 U1.19 | length 446
  Top Layer w15: 150,-412.36 150,-315 160,-305 160,-175 268.08,-66.92 U1.19
SENS_EN_L: Q2.1 R9.2 U1.20 | length 529.2
  Top Layer w15: R9.2@250,-502.36 245.32,-497.68 187.4,-497.68 187.4,-187.6 241.15,-133.85 U1.20
"UVL OUT": R14.1 S1.1 U10.4 | length 520.4
  Top Layer w15: U10.4 v1(-920.59,504.41) ; R14.1 v1(-590,440) S1.1@-590,519.69
  Bottom Layer w15: v1(-920.59,504.41) -654.41,504.41 v1(-590,440)
VBAT/3V0: C1.2 C2.2 C3.2 C4.2 C22.2 C23.2 C24.2 C30.2 C40.2 C41.2 C50.2 C51.2 C60.2 C61.2 C80.2 Q2.2 Q30.2 R9.1 R20.1 R30.1 R31.1 R40.1 R50.2 R60.1 U1.18 U1.33 U1.34 U20.10 U30.3 U30.6 U30.7 U40.5 U40.6 U40.9 U40.10 U50.1 U50.14 U60.1 U60.6 U60.10 U80.5 | length 6862.6
  Top Layer w8: U60.1 -300.81,389.19 -277.19,412.81 U60.6
  Top Layer w10: R60.1 -487.64,222.36 ; -485,-20 -380,-20 -375.84,-15.84 U30.7 ; -395.53,-20 U30.6 ; C30.2 -350,171.38 -350,182.36 -330,202.36 -266.42,202.36 ; U30.3 C30.2@-375.84,137.22 ; C61.2@-374.45,365.83 -348.95,365.83 ; U60.10 -348.95,365.83 ; U60.1 -300.81,341.26 -312.62,329.45 -329,329.45 -348.95,349.4 -348.95,365.83 ; C50.2 C51.2 ; -260.51,202.36 R30.1 R40.1 ; C51.2@-236.69,-360.32 -205,-360.32 ; U50.14 -205,-360.32 ; U50.1 -186.77,-428.23 -205,-410 -205,-360.32 ; R50.2 -15,-255 ; C41.2 50,530 50,455 65,440 134.37,440 149.69,455.31 149.69,475 ; C41.2@57.09,538.46 78.29,538.46 ; U40.6 86.22,518.78 78.29,526.71 78.29,538.46 ; U40.5 78.29,538.46 ; 112.6,-497.68 Q2.2@115,-500.08 ; U40.9 139.84,484.84 149.69,475 ; U40.10 159.53,484.84 149.69,475
  Top Layer w15: U20.10 -384.25,-370.63 C22.2 ; C80.2@-433.62,580 U80.5 ; C22.2@-378.62,-365 C22.2 ; C50.2@-292.76,-366.38 C22.2 ; C1.2 1004.72,-610 1004.72,-565 ; C3.2 1004.72,-565 ; U1.33 1004.72,-565
  Top Layer w20: -483.58,368.58 C60.2 ; -483.62,578.62 C80.2 ; -481.38,141.38 C30.2@-385,141.38 ; C60.2@-427.8,366.38 C61.2 ; -202.36,-247.64 R31.1 ; -30,530 C41.2@50,530 ; v2(55,-495) 66.54,-506.54 ; v2(80,-565) 80,-520 66.54,-506.54 ; Q2.2 66.54,-506.54 ; C2.2 C4.2 U1.18@318.31,1.38 ; v2(245,-585) R9.1
  Top Layer w30: -486.61,-360 C23.2 ; C23.2@-485,-298.39 -485,-250 ; -30,530 -30,635 -60,665 -440,665 -485,620 -485,-20 -485,-250 ; v2(60,-215) 60,-250 ; C2.2 180,-100 125,-155 125,-230 105,-250 60,-250 ; 1004.72,-330 1043.31,-330 1071.65,-358.35 U1.34 ; -485,-250 60,-250
  Top Layer w40: U1.18 464.99,0.01 695,-230 915,-230 1004.72,-319.72 1004.72,-330 U1.33
  Bottom Layer w20: v2(55,-495) 55,-420 110,-365 110,-265 v2(60,-215) ; v2(80,-565) 100,-585 v2(245,-585)
pads on no net: Chirp.4 Chirp.6 M1.0 S1.0 U20.5 U30.5 U30.10 U50.2 U50.3 U50.9 U50.13 U50.15 U50.16 U80.3 U80.4

## Polygon pours and split planes (outlines as drawn)
GND on Top Layer "Top GND" (solid, remove dead copper, pour order 5): -1180,680 -1180,-680 1180,-680 1180,680
GND on Bottom Layer "Bottom GND" (solid, remove dead copper, pour order 8): 1180,680 -1180,680 -1180,-680 1180,-680

## Other copper
Top Layer:
  pour cut-out: 200,680 200,475 25,475 25,500 -410,500 -410,680
  pour cut-out: -1020,-310 -720,-310 -720,-590 -1020,-590
Bottom Layer:
  pour cut-out: 200,680 200,475 25,475 25,500 -410,500 -410,680

## Silkscreen, mask and mechanical layers (free items; w line width, h text height)
Top Overlay:
  lines w1: -1200,-700 -1200,700 1200,700 1540,700 1540,470 1250,470 ccw(c1250,420) 1200,420 1200,-420 ccw(c1250,-420) 1250,-470 1540,-470 1540,-700 1200,-700 -1200,-700
  text "BAT-" at -1135,325 h40
  text "C" at 660,-60 h200
  text "BAT+" at -1140,-180 h40
Mechanical 1:
  lines w1: -1200,-700 1200,-700 1540,-700 1540,-470 1250,-470 cw(c1250,-420) 1200,-420 1200,420 cw(c1250,420) 1250,470 1540,470 1540,700 1200,700 -1200,700 -1200,-700

## Text inside footprints (layer, text, board x,y; h text height)
Chirp: Top Overlay "GND" at -1185,-45 h50 r270; Top Overlay "SDA" at -1185,55 h50 r270; Top Overlay "VCC" at -1185,160 h50 r270
U1: Mechanical 1 "NO" at 752.76,78.75 h78.74 r270; Mechanical 1 "EXPOSED" at 674.02,188.98 h78.74 r270; Mechanical 1 "COPPER" at 595.28,169.3 h78.74 r270